# Altium PCB sphbot.PcbDoc
Units mm, origin at the board's own origin, x right, y up, seen from the top; angles counter-clockwise.
Board outline 73 x 68 mm, 4 copper layers (Top Layer, Internal Plane 1, Internal Plane 2, Bottom Layer); 51 components, 41 nets, 253 pads, 47 vias.
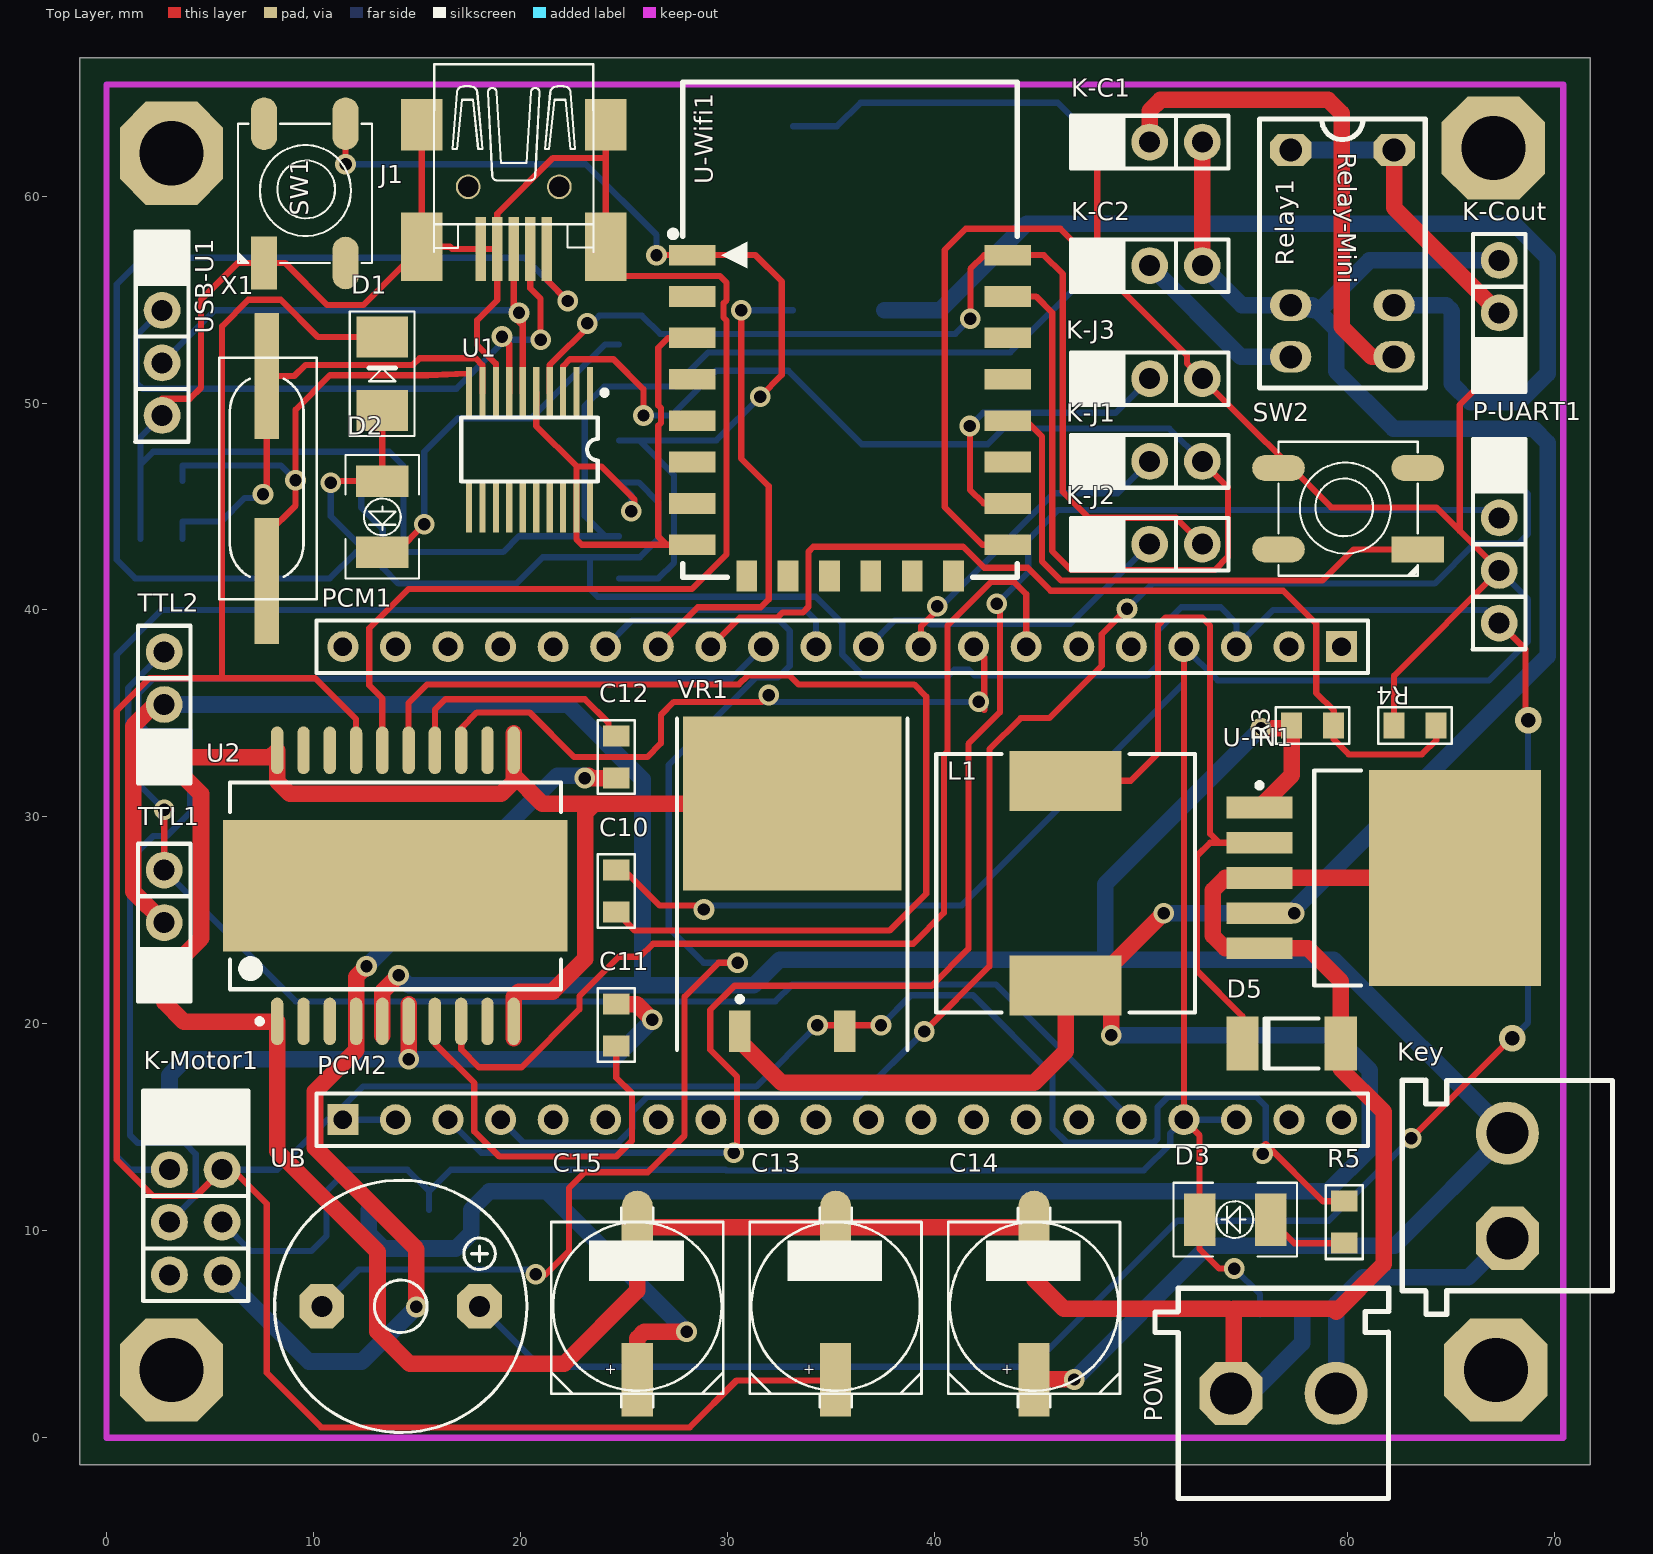
[diagram p0: Top Layer view]
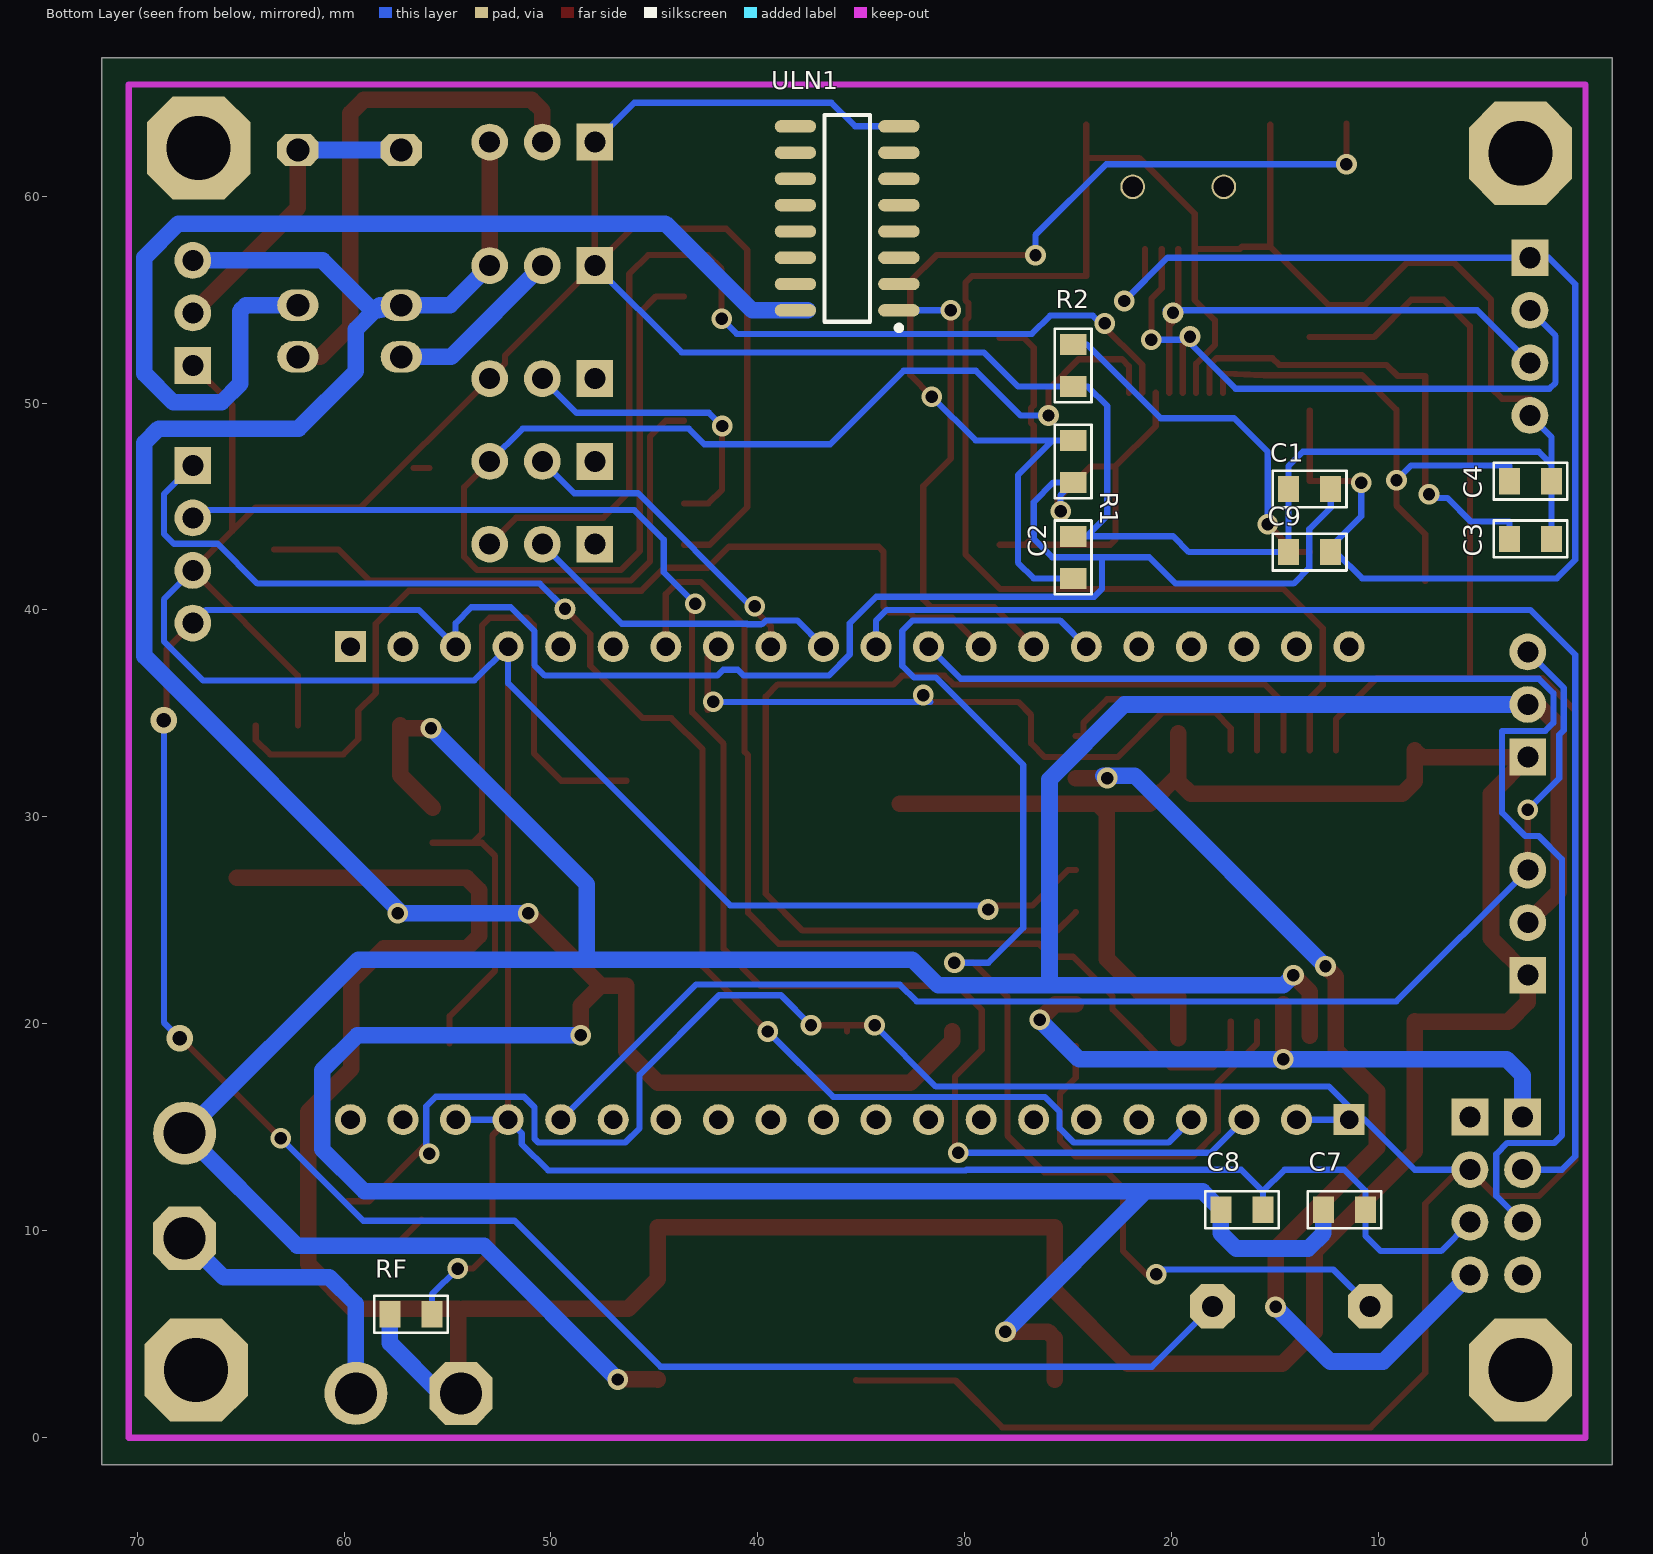
[diagram p1: Bottom Layer view, seen from below]
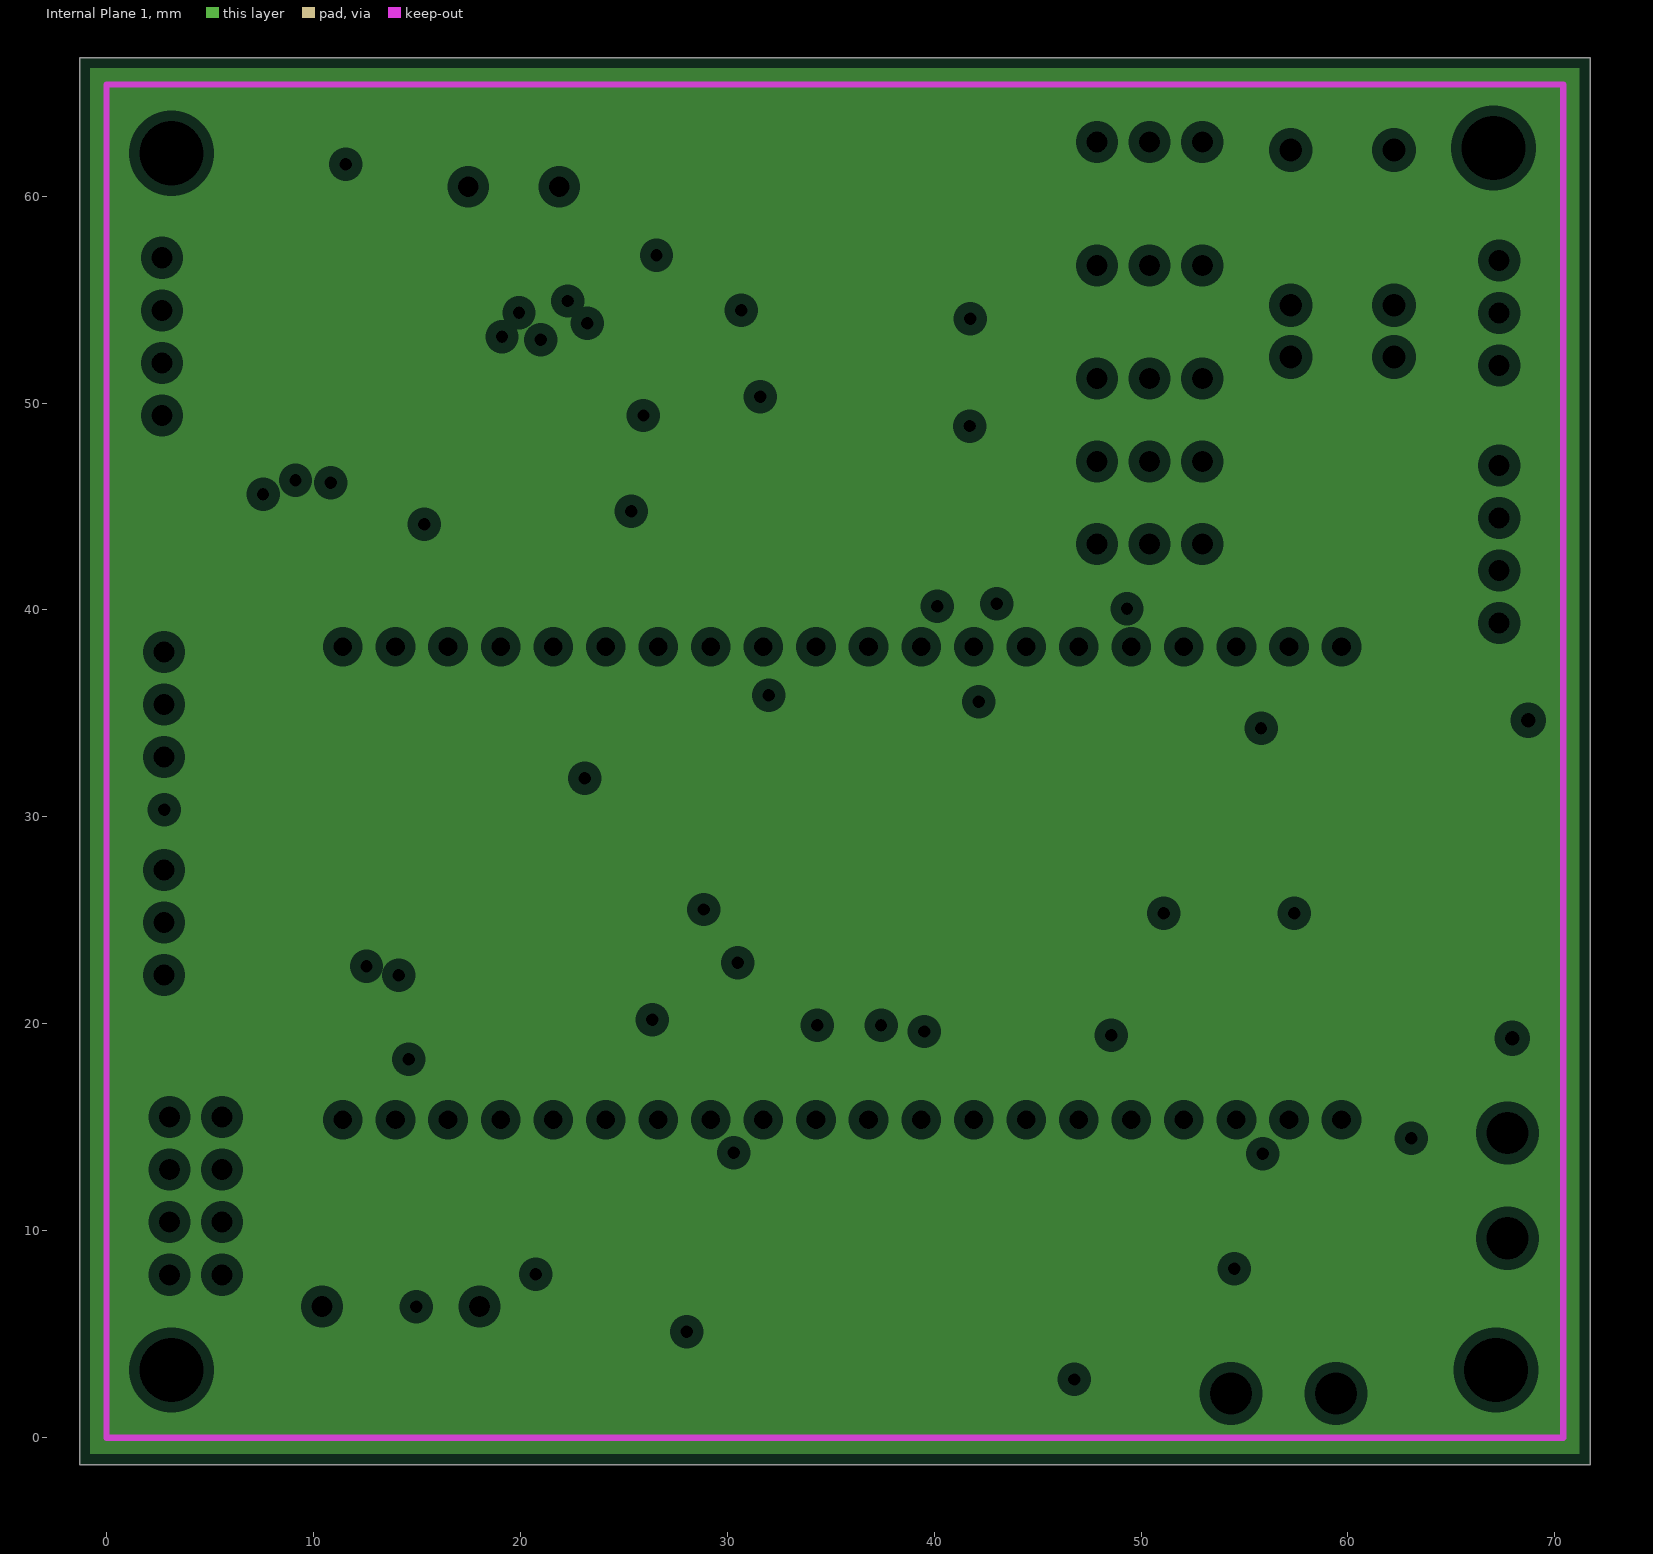
[diagram p2: Internal Plane 1, clearances drawn from the general rule]
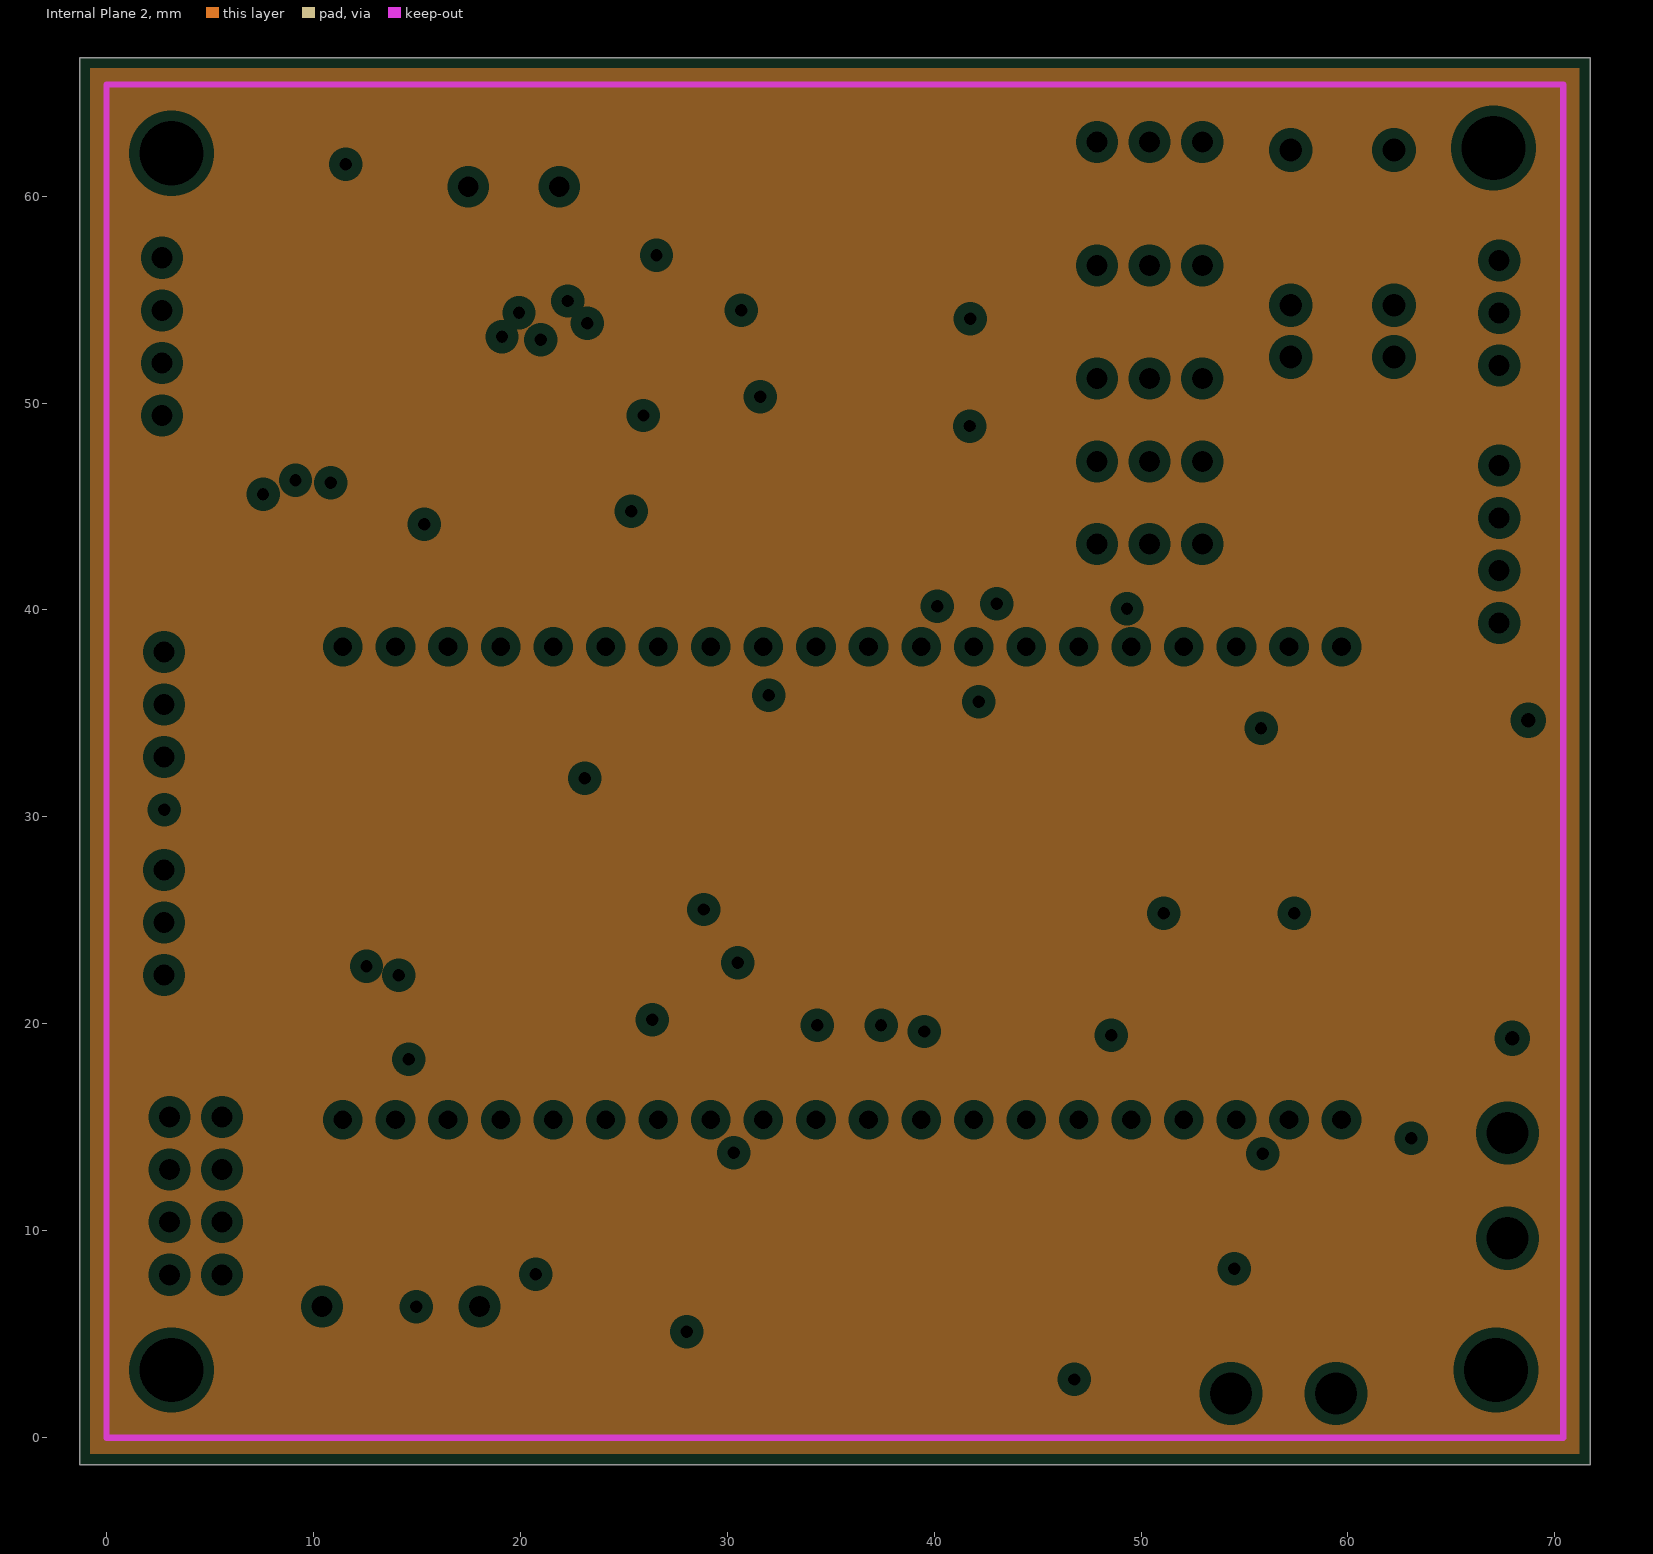
[diagram p3: Internal Plane 2, clearances drawn from the general rule]

## Layer stack, top to bottom
Top Layer: signal copper 0.0356
Dielectric: dielectric 0.32, FR-4, Dk 4.8
Internal Plane 1: plane copper 0.0356
Dielectric: dielectric 0.32, FR-4, Dk 4.8
Internal Plane 2: plane copper 0.0356
Dielectric: dielectric 0.32, FR-4, Dk 4.8
Bottom Layer: signal copper 0.0356

## Board outline
-1.3,-1.3 71.7,-1.3 71.7,66.7 -1.3,66.7

## Design rules (kind name [scope] priority, off if disabled: settings)
Clearance [All] p1: gap=0.2
PlaneClearance [All] p1: clearance=0.508
PlaneConnect [All] p1: planeconnectstyle=Relief reliefexpansion=0.508 reliefentries=4 reliefconductorwidth=0.254 reliefairgap=0.254
PolygonConnect [All] p1: connectstyle=Relief reliefconductorwidth=0.254 reliefentries=4 polygonreliefangle="90 Angle" airgapwidth=0.254
RoutingVias [All] p1: holewidth=0.6 width=1 viastyle="Through Hole" minholewidth=0.711 minwidth=1.27 maxholewidth=0.711 maxwidth=1.27
SolderMaskExpansion [All] p1: expansion=0.102
Width Width_1 [(InNet('+12V') OR InNet('EGND') OR InNet('VIN') OR InNet('C1-IMAGE') OR InNet('C2-IMAGE') OR InNet('IMAGE-OUT') OR InNet('M1-OUT1') OR InNet('M1-OUT2') OR InNet('OUTPUTR1'))] p1: maxlimit=0.8 minlimit=0.8 preferedwidth=0.8
Width [All] p2: maxlimit=1 minlimit=0.3 preferedwidth=0.3
26 further rules are at their usual default settings.

## Components (designator, comment, footprint, x,y, rotation, side; value= is the part's Value field where it differs from the comment)
C1 "1nF" 0805C-TBD 12.573,45.847 r0 bottom
C2 "100nF" 0805C-TBD 24.765,41.783 r90 bottom
C3 "22pF" 0805C-TBD 1.905,43.434 r0 bottom
C4 "22pF" 0805C-TBD 1.905,46.228 r0 bottom
C7 "100nF" 0805C-TBD 12.416,11.019 r180 bottom
C8 "100nF" 0805C-TBD 17.369,11.019 r180 bottom
C9 "100nF" 0805C-TBD 12.573,42.799 r0 bottom
C10 "100nF" 0805C-TBD 24.638,25.654 r90 top
C11 "15nF" 0805C-TBD 24.638,20.701 r270 top
C12 "15nF" 0805C-TBD 24.638,32.131 r90 top
C13 "220uF-25V" PANACAP-F-GENERIC 35.242,6.35 r90 top
C14 "220uF-25V" PANACAP-F-GENERIC 44.831,6.35 r90 top
C15 "220uF-25V" PANACAP-F-GENERIC 25.654,6.35 r90 top
D1 "MBRS140" DIODE-SMA 13.335,48.768 r270 top
D2 "TOPLED-YELLOW" TOPLED-YELLOW 13.335,46.228 r270 top
D3 "TOPLED-RED" TOPLED-RED 56.261,10.541 r180 top
D5 "1N5822" MELF 57.277,19.05 r180 top
J1 "Mini_USB" My_USB 19.685,60.452 r270 top
K-C1 "HEADER-1X3" HEADER-1X3 47.879,62.611 r90 top
K-C2 "HEADER-1X3" HEADER-1X3 47.879,56.642 r90 top
K-Cout "HEADER-1X3" HEADER-1X3 67.31,51.816 r180 top
K-J1 "HEADER-1X3" HEADER-1X3 47.879,47.18 r90 top
K-J2 "HEADER-1X3" HEADER-1X3 47.879,43.18 r90 top
K-J3 "HEADER-1X3" HEADER-1X3 47.879,51.181 r90 top
K-Motor1 "HEADER-2X4" HEADER-2X4 3.048,15.494 r0 top
Key "CON2 pin blue" My_CN2 62.611,7.112 r90 top
L1 "100uh" "WE-PD 1280" 46.355,26.797 r270 top
P-UART1 "HEADER-1X4" HEADER-1X4 67.31,46.99 r0 top
PCM1 "Header 20" HDR1X20 59.69,38.227 r180 top
PCM2 "Header 20" HDR1X20 11.43,15.367 r0 top
POW "CON2 pin blue" My_CN2 51.816,7.239 r0 top
R1 "10K" 0805R-1K 24.765,47.943 r270 bottom
R2 "1K" 0805R-1K 24.765,51.054 r90 bottom
R3 "100K" 0805R-100K 57.531,34.417 r0 top
R4 "10K" 0805R-10K 64.262,34.417 r180 top
R5 "1K" 0805R-1K 59.817,9.652 r90 top
Relay1 "Relay-Mini" Relay_Mini 62.23,62.23 r270 top
RF "1K" 0805R-1K 57.531,5.969 r180 bottom
SW1 "SW-PB6MM-SMD" SW-PB-SMD 7.62,56.769 r90 top
SW2 "SW-PB6MM-SMD" SW-PB-SMD 63.373,42.926 r180 top
TTL1 "HEADER-1X3" HEADER-1X3 2.794,22.352 r180 top
TTL2 "HEADER-1X3" HEADER-1X3 2.794,32.893 r180 top
U1 "CH340T" TSSOP20 20.447,47.752 r180 top
U2 "L6201P" PowerSO20_N 13.97,26.67 r90 top
U-IN1 "LM2576HVS-12.0" TS5B_N 61.722,27.051 r0 top
U-Wifi1 "ESP_12_E" ESP_12_E 27.94,57.15 r0 top
UB "Buzzer small" My_Buzzer 14.224,6.35 r0 top
ULN1 "ULN2003D" SO16_N 35.687,58.928 r0 bottom
USB-U1 "HEADER-1X4" HEADER-1X4 2.692,57.023 r0 top
VR1 "Volt Reg" D2PAK 33.147,25.146 r0 top
X1 "12MHz" XTAL-RU49/4 7.747,51.308 r270 top

## Footprints (in the part's own frame and the unit in brackets; to place one, negate y for a bottom-side part, rotate by r counter-clockwise, add the part's x,y. Pads: shape width x height; smd on the part's side, far side on the other; paste and mask are expansions set on the pad)
0805C-TBD [mil] "CAPACITOR 0805"
  rect 40x50 smd: 1(-10,0) 2(70,0)
  silkscreen extent -40,-35 100,35, body extent -11,-25 70,25, height 26
0805R-1K [mil] "RESISTOR 0805"
  rect 40x50 smd: 1(-10,0) 2(70,0)
  silkscreen extent -40,-35 100,35, body extent -11,-25 70,25, height 27
0805R-10K [mil] "RESISTOR 0805"
  rect 40x50 smd: 1(0,0) 2(80,0)
  silkscreen extent -30,-35 110,35, body extent -1,-25 80,25, height 27
0805R-100K [mil] "RESISTOR 0805"
  rect 40x50 smd: 1(-10,0) 2(70,0)
  silkscreen extent -40,-35 100,35, body extent -11,-25 70,25, height 27
D2PAK [mm] "D2-PAK/TO-263-AB; 3 Leads (1 Cropped); Body 15.5 (inc. leads) x 10.5 mm (LxW max)"
  rect 1.05x2 smd: 1(-2.54,-5.5) 3(2.54,-5.5)
  rect 10.55x8.4 smd: 2(0,5.5)
  silkscreen extent -5.58,-6.4 5.58,9.6
DIODE-SMA [mm]
  rect 2x2.5 smd: A(-0.875,0) K(-4.425,0)
  silkscreen extent -5.65,-1.57 0.35,1.55, body extent -5.2,-1.3 0,1.3, height 2.4
ESP_12_E [mm] "ESP-12 Wi-Fi Module by AI-Thinker"
  rect 2.25x1 smd: 1(0.375,0) 2(0.375,-2) 3(0.375,-4) 4(0.375,-6) 5(0.375,-8) 6(0.375,-10) 7(0.375,-12) 8(0.375,-14) 15(15.625,-14) 16(15.625,-12) 17(15.625,-10) 18(15.625,-8) 19(15.625,-6) 20(15.625,-4) 21(15.625,-2) 22(15.625,0)
  rect 1x1.5 smd: 9(3,-15.5) 10(5,-15.5) 11(7,-15.5) 12(9,-15.5) 13(11,-15.5) 14(13,-15.5)
  silkscreen extent -0.7,-15.57 16.08,8.37, body extent 0,-15.49 16,8.51, height 2.75
HDR1X20 [mm] "Connector; Header; 20 Position"
  rect 1.5x1.5 hole 0.9: 1(0,0)
  round 1.5 hole 0.9: 2(2.54,0) 3(5.08,0) 4(7.62,0) 5(10.16,0) 6(12.7,0) 7(15.24,0) 8(17.78,0) 9(20.32,0) 10(22.86,0) 11(25.4,0) 12(27.94,0) 13(30.48,0) 14(33.02,0) 15(35.56,0) 16(38.1,0) 17(40.64,0) 18(43.18,0) 19(45.72,0) 20(48.26,0)
  silkscreen extent -1.27,-1.27 49.53,1.27
HEADER-1X3 [mil]
  rect 70x70 hole 40: 1(0,0)
  round 70 hole 40: 2(0,-100) 3(0,-200)
  silkscreen extent -50,-250 50,50, body extent -50,-250 50,50, height 470
HEADER-1X4 [mil]
  rect 70x70 hole 40: 1(0,0)
  round 70 hole 40: 2(0,-100) 3(0,-200) 4(0,-300)
  silkscreen extent -51,-350 50,50, body extent -50,-350 50,50, height 470
HEADER-2X4 [mil]
  rect 70x70 hole 40: 1(0,0) 2(100,0)
  round 70 hole 40: 3(0,-100) 4(100,-100) 5(0,-200) 6(100,-200) 7(0,-300) 8(100,-300)
  silkscreen extent -50,-350 150,50, body extent -50,-350 150,50, height 470
MELF [mm] "Metal Electrode Face (MELF) Diode; Body 5 x 2.5 mm (LxDia)"
  rect 1.55x2.6 smd: 1(-2.375,0) 2(2.375,0)
  silkscreen extent -1.3,-1.2 1.3,1.2
My_Buzzer [mil]
  oct 85x85 hole 40: +(150,0) -(-150,0)
  silkscreen extent -240,-240 240,240
My_CN2 [mil]
  oct 120x120 hole 80: 1(99.5,-200.5)
  round 120 hole 80: 2(299.5,-200.5)
  silkscreen extent -45,-401 400,-1
My_USB [mm]
  rect 3.1x0.5 smd: 1(3,1.6) 2(3,0.8) 3(3,0) 4(3,-0.8) 5(3,-1.6)
  rect 2.5x2 smd: 5(-3,4.45) 5(-3,-4.45)
  rect 3.3x2 smd: 5(2.9,4.45) 5(2.9,-4.45)
  round 1.2 hole 1 unplated: ""(0,2.2) ""(0,-2.2)
  silkscreen extent -5.92,-3.85 3.16,3.85
PANACAP-F-GENERIC [mil]
  rect 140x59.06 smd: +(-140,0)
  oval 140x59.06 smd: -(150,0)
  silkscreen extent -192,-163 187,163, body extent -195,-163 195,163, height 402
PowerSO20_N [mm] "SOP, 20-Leads, Body 15.9x11mm, Pitch 1.27mm, IPC Medium Density"
  oval 2.3x0.6 smd: 1(-6.55,5.715) 2(-6.55,4.445) 3(-6.55,3.175) 4(-6.55,1.905) 5(-6.55,0.635) 6(-6.55,-0.635) 7(-6.55,-1.905) 8(-6.55,-3.175) 9(-6.55,-4.445) 10(-6.55,-5.715) 11(6.55,-5.715) 12(6.55,-4.445) 13(6.55,-3.175) 14(6.55,-1.905) 15(6.55,-0.635) 16(6.55,0.635) 17(6.55,1.905) 18(6.55,3.175) 19(6.55,4.445) 20(6.55,5.715)
  rect 6.35x16.65 smd: 21(0,0)
  silkscreen extent -6.67,-8 5,8, body extent -5.55,-8 5.55,8, height 3.6
Relay_Mini [mm]
  oct 1.524x2 hole 1.1: 0(0,0) 1(0,-5)
  oval 1.524x2 hole 1.1: 2(10,-5) 3(10,0) 4(7.5,-5) 5(7.5,0)
  silkscreen extent -1.5,-6.5 11.5,1.5, body extent -1.63,-6.63 11.63,1.63, height 10
SO16_N [mm] "SOIC, 16-Leads, Body 9.9x3.8mm, Pitch 1.27mm, IPC Medium Density"
  oval 2x0.6 smd: 1(-2.5,4.445) 2(-2.5,3.175) 3(-2.5,1.905) 4(-2.5,0.635) 5(-2.5,-0.635) 6(-2.5,-1.905) 7(-2.5,-3.175) 8(-2.5,-4.445) 9(2.5,-4.445) 10(2.5,-3.175) 11(2.5,-1.905) 12(2.5,-0.635) 13(2.5,0.635) 14(2.5,1.905) 15(2.5,3.175) 16(2.5,4.445)
  silkscreen extent -2.62,-5 1.1,5.42, body extent -2,-5 2,5, height 1.75
SW-PB-SMD [mil]
  rect 100x50 smd: 1(0,0)
  oval 100x50 smd: 2(265,-155) 3(0,-155) 4(265,0)
  silkscreen extent 0,-205 265,50, body extent -28,-206 297,50, height 140
TOPLED-RED [mil]
  rect 60x100 smd: A(0,0) K(135,0)
  silkscreen extent -50,-70 185,70, body extent -20,-60 154,60, height 75
TOPLED-YELLOW [mil]
  rect 60x100 smd: A(0,0) K(135,0)
  silkscreen extent -50,-70 185,70, body extent -20,-60 154,60, height 75
TS5B_N [mm] "D2-PAK, 6-Leads, Body 8.6x10.2mm, Pitch 1.7mm, Lead Span 14.1mm, IPC Medium Density"
  rect 3.2x1.05 smd: 1(-6,3.4) 2(-6,1.7) 3(-6,0) 4(-6,-1.7) 5(-6,-3.4)
  rect 8.3x10.45 smd: 6(3.45,0)
  silkscreen extent -6.12,-5.2 -1.1,5.2, body extent -3.35,-5.2 6.05,5.2, height 4.65
TSSOP20 [mm] "Shrink Small Outline; 20 Leads; Body Width 4.4 mm; Pitch 0.65 mm"
  rect 0.3x2.5 smd: 1(-2.925,-2.75) 2(-2.275,-2.75) 3(-1.625,-2.75) 4(-0.975,-2.75) 5(-0.325,-2.75) 6(0.325,-2.75) 7(0.975,-2.75) 8(1.625,-2.75) 9(2.275,-2.75) 10(2.925,-2.75) 11(2.925,2.75) 12(2.275,2.75) 13(1.625,2.75) 14(0.975,2.75) 15(0.325,2.75) 16(-0.325,2.75) 17(-0.975,2.75) 18(-1.625,2.75) 19(-2.275,2.75) 20(-2.925,2.75)
  silkscreen extent -3.75,-2.87 3.3,1.55
"WE-PD 1280" [mm] "SMD Inductor, 2-Leads, Body 12,0x12,0mm"
  rect 2.9x5.4 smd: 1(-4.95,0) 2(4.95,0)
  silkscreen extent -6.25,-6.25 6.25,6.25, body extent -6,-6 6,6, height 7.99
XTAL-RU49/4 [mil]
  rect 240x47.24 smd: 1(0,0) 2(390,0)
  silkscreen extent -35,-90 425,95, body extent -78,-90 468,95, height 120

## Part data
C1: library part 0805C-18PF-50V-C0G-JOH, "CAPACITOR 0805 CERAMIC"
C2 C7 C8 C9 C10 C11 C12: library part 0805C-100nF-25V-X7R-MUR, "CAPACITOR 0805 CERAMIC"
C3 C4: library part "Cap Semi", "Capacitor (Semiconductor SIM Model)"
C13 C14 C15: library part PANACAP-220UF-25V-FK, "GENERIC CAPACITOR POLARISED"
D1: "DIODE"
D3: library part TOPLED-BLUE, "TOPLED-BLUE"
D5: library part ZMU100, "High-Voltage Power Zener Diode"
J1: "USB 2.0, Right Angle, SMT, B Type, Receptacle, 5 Position, Black"
Key POW: "Connector blue screw"
L1: library part "WE-PD 1280, XL, 744770122", "SMD-Shielded Power Inductor WE-PD, L=22.0 µH"
PCM1 PCM2: "Header, 20-Pin"
R1 R5 RF: library part ERJ6RS, "Low Ohmic Value Thick Film Chip Resistor, 0.1 Ohm to 0.2 Ohm Range, 1%, 2% and 5% Tolerance, 0805 Size, 0.125 W"
R2: library part "Res Semi", "Semiconductor Resistor"
R3: library part 0805R-100K, "RESISTOR 0805 1/4 WATT THIN FILM"
R4: library part 0805R-10K, "RESISTOR 0805 1/4 WATT THIN FILM"
SW1 SW2: "PUSHBUTTON SWITCH 6MM SMD"
U2: "DMOS Full Bridge Driver"
U-IN1: library part LM2576HVS-5.0, "SIMPLE SWITCHER; 3A Step-Down Voltage Regulator"
U-Wifi1: "ESP-12 Wi-Fi Module by AI-Thinker"
UB: library part Buzzer, "5-12v small buzzer (12mm)"
ULN1: library part ULN2002D, "Seven Darlington Array"
VR1: "Voltage Regulator"
X1: library part CRYSTAL-GENERIC, "GENERIC CRYSTAL"

## Free pads (board coordinates)
  oct 5x5 hole 3.1: 0(3.145,62.073) 1(67.026,62.327) 2(67.153,3.272) 3(3.145,3.272)

## Via types
v1: diameter 1, hole 0.6, Top Layer to Bottom Layer, 45 vias
v2: diameter 1.27, hole 0.711, Top Layer to Bottom Layer, 2 vias

## Nets (pads, with @x,y where several pads share a name; then routed paths per layer and width w, separated by ;. In a path a pad name is that pad's centre, name@x,y a point inside that pad or via, vN(x,y) a via of type N, cw(c..) or ccw(c..) an arc to the next point about the centre after c; other vN are vias at no path point)
+3.3V: C1.1 P-UART1.4 PCM1.3 R1.2 U1.5 U1.19 U-Wifi1.3 U-Wifi1.8 UB.+ | length 185.3
  Top Layer w0.3: U1.5 20.772,48.891 22.722,46.941 ; v1(25.37,44.776) 25.527,44.933 25.527,45.339 23.925,46.941 22.722,46.941 ; U-Wifi1.8 27.072,43.15 ; U-Wifi1.3 27.148,53.15 26.67,52.672 26.67,49.885 26.804,49.75 26.804,49.046 26.67,48.912 26.67,43.552 27.072,43.15 ; v1(63.064,14.473) v2@67.92,19.329 ; P-UART1.4 68.58,38.1 v2@68.58,34.925 ; 22.722,46.941 U1.19 22.722,43.404 22.976,43.15 27.072,43.15
  Bottom Layer w0.3: C1.1 12.319,44.949 13.356,43.912 13.356,42.032 14.113,41.275 19.812,41.275 21.082,42.545 25.781,42.545 26.67,43.434 26.67,45.212 25.717,46.165 R1.2 25.37,45.56 v1(25.37,44.776) ; UB.+ 20.955,3.429 44.704,3.429 51.761,10.486 59.076,10.486 v1(63.064,14.473) ; 23.368,42.545 23.368,41.021 23.749,40.64 34.281,40.64 35.56,39.361 35.56,37.849 36.579,36.83 40.683,36.83 40.969,37.117 41.673,37.117 41.96,36.83 50.292,36.83 50.8,37.338 50.8,38.989 51.943,40.132 53.848,40.132 54.61,39.37 PCM1.3 56.388,40.005 66.675,40.005 P-UART1.4 ; v2(67.945,19.304) 68.707,20.066 v2(68.707,34.671)
+5V: C13.+ D1.K K-Motor1.4 PCM2.1 PCM2.2 R5.2 U2.17 VR1.3 | length 188.9
  Top Layer w0.3: U2.17 12.065,34.717 10.084,36.698 ; D1.K 10.222,53.193 8.424,54.991 6.858,54.991 5.588,53.721 5.588,36.698 10.084,36.698 ; v1(34.362,19.934) VR1.3@35.687,19.934 ; C13.+ 35.243,2.764 30.45,2.764 28.186,0.5 10.387,0.5 7.747,3.14 7.747,11.303 5.855,13.195 4.339,11.679 ; VR1.3 VR1.3@35.687,19.934 ; v1(37.435,19.934) VR1.3@35.687,19.934 ; v1(55.88,13.716) 55.88,14.046 56.028,14.194 58.792,11.43 R5.2 ; 4.339,11.679 K-Motor1.4 4.339,11.705 4.339,11.679 ; 4.339,11.679 2.256,11.679 0.5,13.435 0.5,35.12 2.078,36.698 10.084,36.698
  Bottom Layer w0.3: K-Motor1.4 8.255,12.954 10.668,15.367 PCM2.1 ; PCM2.2 PCM2.1 ; v1(34.362,19.934) 31.394,16.967 12.395,16.967 11.43,16.002 PCM2.1 ; v1(37.435,19.934) 38.883,21.382 41.88,21.382 45.715,17.547 45.715,14.956 46.404,14.267 50.618,14.267 50.795,14.445 50.795,15.972 51.303,16.48 55.571,16.48 56.028,16.023 56.028,13.864 v1(55.88,13.716)
+12V: C7.1 C8.1 C15.+ K-C1.3 K-C2.3 K-Cout.3 L1.2 Relay1.4 U-IN1.4 VR1.1 | length 186
  Top Layer w0.8: C15.+ 25.654,4.796 25.984,5.126 v1(28.037,5.126) ; VR1.1 30.607,19.177 32.639,17.145 44.831,17.145 46.355,18.669 L1.2 L1.2@47.595,21.847 ; v1(48.56,19.452) 48.56,20.882 L1.2@47.595,21.847 ; v1(51.093,25.345) L1.2@47.595,21.847 ; K-C2.3 K-C1.3
  Bottom Layer w0.8: C7.1 12.67,9.876 13.402,9.144 16.891,9.144 17.623,9.876 C8.1 18.512,11.908 59.025,11.908 61.057,13.94 61.057,17.75 59.355,19.452 v1(48.56,19.452) ; 21.255,11.908 v1(28.037,5.126) ; v1(51.093,25.345) 57.222,25.345 69.65,37.773 69.65,48.079 68.961,48.768 62.195,48.768 59.431,51.532 59.431,53.564 58.569,54.426 ; K-C2.3 54.871,54.73 Relay1.4 ; K-Cout.3 61.039,56.896 58.569,54.426 ; Relay1.4 58.265,54.73 58.569,54.426 ; Relay1.4 58.569,54.426
  other v1: 57.404,25.351
+U2-VUSB: C9.1 D1.A D2.A J1.1 USB-U1.1 | length 62.1
  Top Layer w0.3: v1(10.841,46.147) 10.922,46.228 D2.A 13.335,47.925 D1.A ; J1.1 21.285,55.949 v1(22.301,54.933)
  Bottom Layer w0.3: v1(10.841,46.147) 10.841,44.531 12.319,43.053 C9.1 12.065,42.799 10.795,41.529 1.397,41.529 0.5,42.426 0.5,55.745 1.778,57.023 USB-U1.1 20.212,57.023 v1(22.301,54.933)
ADC0: PCM1.13 R3.2 R4.1 | length 46.5
  Top Layer w0.3: PCM1.13 30.607,39.624 32.417,39.624 32.671,39.878 33.655,39.878 33.93,40.153 33.93,42.82 34.163,43.053 41.402,43.053 42.418,42.037 44.524,42.037 45.63,40.931 56.875,40.931 58.466,39.34 58.466,35.987 59.309,35.144 R3.2 59.309,33.752 60.041,33.02 63.576,33.02 64.262,33.706 R4.1
BUZZER: PCM1.15 UB.- | length 63.9
  Top Layer w0.3: v1(20.753,7.895) 21.23,7.895 22.352,9.017 22.352,12.065 23.114,12.827 26.162,12.827 27.94,14.605 27.94,21.311 29.586,22.957 v1(30.501,22.957)
  Bottom Layer w0.3: UB.- 12.192,8.128 20.52,8.128 v1(20.753,7.895) ; PCM1.15 25.4,39.497 32.512,39.497 33.02,38.989 33.02,37.3 32.46,36.74 31.405,36.74 27.178,32.513 27.178,24.638 28.859,22.957 v1(30.501,22.957)
C1-IMAGE: K-C1.2 Relay1.3 | length 24.7
  Top Layer w0.8: K-C1.2 50.419,64.135 50.934,64.65 59.048,64.65 59.69,64.008 59.69,53.686 61.146,52.23 Relay1.3
C2-IMAGE: K-C2.2 Relay1.2 | length 8.6
  Bottom Layer w0.8: K-C2.2 54.831,52.23 Relay1.2
CHANNELA: K-Motor1.5 PCM1.12 | length 63.7
  Bottom Layer w0.3: K-Motor1.5 4.318,11.684 4.318,13.707 3.78,14.245 1.503,14.245 1.143,14.605 1.143,27.965 2.256,29.078 2.916,29.078 4.034,30.196 4.034,34.158 1.951,34.158 1.555,34.555 1.555,35.972 2.256,36.673 30.196,36.673 PCM1.12
CHANNELB: K-Motor1.3 PCM1.11 | length 63.2
  Bottom Layer w0.3: K-Motor1.3 1.143,12.954 0.5,13.597 0.5,37.838 2.667,40.005 33.782,40.005 34.29,39.497 PCM1.11
EGND: C13.- C14.- C15.- D5.1 POW.1 RF.1 TTL1.1 TTL2.1 U2.1 U2.10 U2.11 U2.20 U-IN1.3 U-IN1.5 U-IN1.6 VR1.2 | length 188.7
  Top Layer w0.8: U2.1 U2.1@8.255,20.112 ; U2.10@19.685,19.304 19.685,21.306 19.939,21.56 21.56,21.56 23.135,23.135 23.135,30.196 23.585,30.646 ; U2.11@19.685,34.036 19.685,32.013 ; VR1.2 23.585,30.646 ; POW.1@54.229,2.261 54.483,2.515 54.483,6.223 59.423,6.223 ; 54.229,6.223 46.27,6.223 44.831,7.662 C14.- C13.- C15.- 25.654,7.107 22.123,3.577 14.651,3.577 13.102,5.126 13.102,8.995 8.255,13.842 U2.1@8.255,20.112 ; 59.423,6.083 61.722,8.382 61.722,15.756 59.652,17.826 D5.1 59.652,22.068 58.069,23.651 U-IN1.5 54.072,23.651 53.467,24.256 53.467,26.446 54.072,27.051 U-IN1.3 U-IN1.6 ; U2.1@8.255,20.112 3.734,20.112 2.794,21.052 TTL1.1 4.572,24.13 4.572,31.115 TTL2.1 7.928,32.893 U2.20 8.255,31.715 8.86,31.11 19.075,31.11 19.685,31.72 19.685,32.013 ; 19.685,32.013 21.052,30.646 23.585,30.646
  Bottom Layer w0.8: POW.1 55.359,2.146 57.785,4.572 RF.1
GND: C1.2 C2.2 C3.1 C4.1 C7.2 C8.2 C9.2 C10.2 D3.K J1.4 J1.5 K-C1.1 K-C2.1 K-Cout.1 K-J3.3 K-Motor1.6 P-UART1.3 PCM1.4 PCM2.17 PCM2.18 R2.1 R4.2 RF.2 SW1.1 SW2.2 U1.8 U2.16 U-Wifi1.15 ULN1.8 USB-U1.4 | length 404.8
  Top Layer w0.3: USB-U1.4 2.692,50.211 4.034,50.211 4.572,50.749 4.572,54.991 6.35,56.769 SW1.1 8.636,56.769 10.668,54.737 12.42,54.737 J1.5@15.235,57.552 ; U2.16 13.335,35.729 12.7,36.364 12.7,39.116 14.605,41.021 28.306,41.021 29.972,42.687 29.972,53.987 29.829,54.131 29.829,54.835 29.972,54.978 29.972,55.82 29.658,56.134 24.135,56.134 24.135,57.552 J1.5@24.135,63.452 ; J1.5@15.235,63.452 J1.5@15.235,57.552 ; U1.8 18.822,51.896 17.916,52.802 17.916,54.008 18.885,54.977 J1.4 ; 24.135,61.849 21.582,61.849 18.885,59.152 J1.4 ; C10.2 25.019,27.432 26.725,25.726 28.596,25.726 28.794,25.527 v1(28.875,25.527) ; U-Wifi1.15 42.337,43.15 40.513,44.974 40.513,57.404 41.529,58.42 46.101,58.42 K-C2.1 ; K-C1.1 K-C2.1 ; PCM1.4 PCM2.17 52.832,14.605 D3.K 52.832,9.114 53.772,8.174 v1(54.504,8.174) ; SW2.2@55.88,46.863 SW2.2 ; R4.2 62.23,36.83 P-UART1.3 64.262,44.958 59.182,44.958 K-J3.3 52.218,51.922 52.218,52.303 K-C2.1 ; 65.405,43.815 65.405,49.911 K-Cout.1 ; J1.5@15.235,57.552 16.607,57.552 16.707,57.452 18.085,57.452 J1.4
  Bottom Layer w0.3: C3.1 C4.1 1.651,47.041 ; USB-U1.4 1.651,48.362 1.651,47.041 ; K-Motor1.6 6.985,9.017 9.906,9.017 10.638,9.749 C7.2 10.638,11.933 11.659,12.954 14.545,12.954 15.591,11.908 ; C8.2 15.591,11.908 ; C2.2 24.1,43.561 ; v1(28.875,25.527) 28.794,25.527 28.596,25.726 41.347,25.726 52.07,36.449 PCM1.4 53.7,36.597 66.822,36.597 68.707,38.482 68.707,40.513 P-UART1.3 ; ULN1.8 35.301,63.373 36.444,64.516 45.974,64.516 K-C1.1 ; K-C2.1 43.688,52.451 29.078,52.451 27.427,50.8 R2.1 24.054,50.8 23.114,49.86 23.114,44.547 24.1,43.561 ; v1(54.504,8.174) 55.753,6.925 RF.2 ; PCM2.18 PCM2.17 51.408,14.705 51.408,14.192 50.132,12.917 29.958,12.917 29.921,12.954 16.637,12.954 15.591,11.908 ; 1.651,47.041 2.256,47.646 13.665,47.646 14.351,46.96 C1.2 C9.2 19.172,42.799 19.934,43.561 24.1,43.561
IMAGE-OUT: K-Cout.2 Relay1.0 Relay1.1 | length 15
  Top Layer w0.8: Relay1.0 62.23,59.436 K-Cout.2
  Bottom Layer w0.8: Relay1.1 Relay1.0
M1-OUT1: C11.1 K-Motor1.1 U2.6 | length 31.2
  Top Layer w0.8: v1(14.605,18.283) U2.6@14.605,20.955 ; C11.1 25.624,20.955 v1(26.386,20.193)
  Bottom Layer w0.8: K-Motor1.1 3.048,17.526 3.805,18.283 24.476,18.283 v1(26.386,20.193)
M1-OUT2: C12.1 K-Motor1.8 U2.4 | length 48.2
  Top Layer w0.8: v1(12.568,22.779) 12.065,22.276 U2.4 12.065,18.719 10.08,16.734 10.08,14.017 14.981,9.116 v1(14.981,6.32) ; v1(23.114,31.877) 23.19,31.877 23.313,31.999 23.435,31.877 C12.1
  Bottom Layer w0.8: K-Motor1.8 9.779,3.683 12.344,3.683 v1(14.981,6.32) ; v1(12.568,22.779) 21.789,31.999 23.313,31.999 23.19,31.877 v1(23.114,31.877)
NetC2_1: C2.1 R1.1 SW1.2 U-Wifi1.1 | length 49.2
  Top Layer w0.3: v1(11.557,61.54) SW1.2 ; v1(26.585,57.15) U-Wifi1.1 31.369,57.15 32.639,55.88 32.639,51.359 v1(31.593,50.313)
  Bottom Layer w0.3: v1(11.557,61.54) 23.169,61.54 26.585,58.124 v1(26.585,57.15) ; C2.1 26.67,41.529 27.432,42.291 27.432,46.516 25.751,48.197 ; R1.1 25.751,48.197 ; v1(31.593,50.313) 29.477,48.197 25.751,48.197
NetC10_1: C10.1 U2.15 | length 53.9
  Top Layer w0.3: U2.15 14.605,35.509 15.501,36.405 30.563,36.405 30.988,36.83 33.02,36.83 33.445,36.405 39.033,36.405 39.624,35.814 39.624,26.289 37.846,24.511 25.527,24.511 C10.1
NetC11_2: C11.2 U2.7 | length 19.4
  Top Layer w0.3: U2.7 15.875,19.05 17.78,17.145 17.78,14.799 18.99,13.589 24.638,13.589 25.4,14.351 25.4,16.637 24.638,17.399 C11.2
NetC12_2: C12.2 U2.14 | length 12
  Top Layer w0.3: U2.14 15.875,35.179 16.383,35.687 23.125,35.687 24.265,34.547 24.265,33.909 C12.2
NetD2_K: D2.K R2.2 | length 17.6
  Top Layer w0.3: D2.K 14.021,42.799 v1(15.362,44.141)
  Bottom Layer w0.3: v1(15.362,44.141) 15.362,47.646 16.988,49.271 20.539,49.271 24.1,52.832 R2.2
NetD3_A: D3.A R5.1 | length 4
  Top Layer w0.3: D3.A 57.404,9.398 R5.1
NetD5_2: D5.2 L1.1 U-IN1.2 | length 38
  Top Layer w0.3: L1.1 49.5,31.747 50.821,33.068 50.821,39.264 51.181,39.624 52.959,39.624 53.335,39.248 53.335,29.183 53.767,28.751 ; D5.2 54.902,20.374 52.705,22.571 52.705,28.118 53.338,28.751 53.767,28.751 ; U-IN1.2 53.767,28.751
NetK-J3_2: K-J3.2 U-Wifi1.16 | length 14.8
  Top Layer w0.3: v1(41.728,48.89) 41.728,45.81 42.388,45.15 U-Wifi1.16
  Bottom Layer w0.3: v1(41.728,48.89) 42.367,49.53 48.768,49.53 K-J3.2
NetKey_1: Key.1 POW.2 | length 13.5
  Bottom Layer w0.8: POW.2@60.071,2.794 59.436,3.429 59.436,6.477 60.706,7.747 65.811,7.747 Key.1
NetSW2_1: SW2.1 U-Wifi1.18 | length 27.2
  Top Layer w0.3: U-Wifi1.18 44.449,49.15 45.212,48.387 45.212,42.349 46.13,41.431 58.774,41.431 60.27,42.926 SW2.1
OUTPUTR1: Relay1.5 ULN1.16 | length 52.1
  Bottom Layer w0.8: ULN1.16@37.592,54.483 40.28,54.483 44.471,58.674 68.012,58.674 69.65,57.036 69.65,51.427 68.261,50.038 65.913,50.038 65.024,50.927 65.024,54.446 64.74,54.73 Relay1.5
PCM0: PCM1.14 ULN1.1 | length 23.3
  Top Layer w0.3: PCM1.14 28.575,40.132 31.623,40.132 32.004,40.513 32.004,45.99 30.679,47.316 v1(30.679,54.483)
  Bottom Layer w0.3: v1(30.679,54.483) ULN1.1
PWM0: PCM1.7 U2.8 | length 49.9
  Top Layer w0.3: U2.8 17.145,18.766 18.004,17.907 20.066,17.907 22.86,20.701 22.86,21.336 24.765,23.241 25.781,23.241 26.416,23.876 38.989,23.876 40.471,25.358 40.471,32.978 40.64,33.147 40.64,39.243 42.744,41.347 43.87,41.347 44.45,40.767 PCM1.7
PWM1: PCM1.8 U2.13 | length 34.1
  Top Layer w0.3: U2.13 17.145,34.29 17.907,35.052 20.447,35.052 22.606,32.893 26.137,32.893 26.797,33.553 26.797,34.925 27.427,35.555 31.669,35.555 v1(32.004,35.89) ; PCM1.8 42.418,37.719 42.418,35.17 42.028,35.56 v1(42.164,35.56)
  Bottom Layer w0.3: v1(32.004,35.89) 31.669,35.555 42.023,35.555 42.028,35.56 v1(42.164,35.56)
RX2: K-J2.2 PCM1.10 | length 15.8
  Bottom Layer w0.3: PCM1.10 38.1,39.497 39.604,39.497 39.774,39.327 39.826,39.327 39.845,39.307 40.498,39.307 40.531,39.34 46.579,39.34 K-J2.2
RX3: P-UART1.1 PCM2.4 | length 73.7
  Top Layer w0.3: v1(39.518,19.63) 42.672,22.784 42.672,33.274 44.177,34.779 45.574,34.779 48.103,37.308 48.103,38.832 v1(49.322,40.051)
  Bottom Layer w0.3: PCM2.4 20.15,14.267 24.732,14.267 25.421,14.956 25.421,15.756 26.132,16.467 36.355,16.467 v1(39.518,19.63) ; v1(49.322,40.051) 50.546,41.275 64.186,41.275 66.112,43.201 68.22,43.201 68.707,43.688 68.707,45.593 P-UART1.1
TTL: PCM2.16 TTL1.3 TTL2.3 | length 64.4
  Top Layer w0.3: TTL1.3 v1(2.794,30.344)
  Bottom Layer w0.3: TTL1.3 9.144,21.082 32.326,21.082 33.144,21.901 42.997,21.901 PCM2.16 ; v1(2.794,30.344) 1.27,31.868 1.27,33.969 1.055,34.184 1.055,36.234 TTL2.3
TX2: K-J1.2 PCM1.9 | length 15.7
  Top Layer w0.3: PCM1.9 39.37,39.218 40.31,40.157 40.165,40.157 v1(40.146,40.177)
  Bottom Layer w0.3: v1(40.146,40.177) 40.165,40.157 40.31,40.157 45.792,45.639 48.878,45.639 K-J1.2
TX3: P-UART1.2 PCM2.3 | length 80.3
  Top Layer w0.3: v1(30.31,13.767) 30.48,13.937 30.48,17.45 29.18,18.75 29.18,20.671 30.353,21.844 39.878,21.844 41.656,23.622 41.656,33.528 43.18,35.052 43.18,40.148 v1(43.023,40.305)
  Bottom Layer w0.3: PCM2.3 18.11,13.767 v1(30.31,13.767) ; v1(43.023,40.305) 44.547,41.829 44.547,43.404 45.974,44.831 66.929,44.831 P-UART1.2
U2-USB2D+: J1.3 U1.6 USB-U1.3 | length 29.6
  Top Layer w0.3: J1.3 19.685,54.179 20.124,53.74 20.124,52.208 20.122,52.206 U1.6@20.122,51.383 ; v1(19.939,54.356) 19.939,54.121 20.134,53.925 20.134,51.383 U1.6@20.122,51.383 ; U1.6 U1.6@20.122,51.383
  Bottom Layer w0.3: USB-U1.3 5.232,54.483 20.301,54.483 19.939,54.121 v1(19.939,54.356)
U2-USB2D-: J1.2 U1.7 USB-U1.2 | length 32.1
  Top Layer w0.3: v1(19.117,53.213) 19.472,52.858 U1.7 ; J1.2 20.485,55.545 20.984,55.046 v1(20.984,53.056)
  Bottom Layer w0.3: USB-U1.2 1.453,53.244 1.453,50.988 1.748,50.694 16.912,50.694 19.274,53.056 v1(20.984,53.056)
U2-X1: C3.2 U1.9 X1.1 | length 24
  Top Layer w0.3: v1(7.569,45.593) 7.747,45.415 X1.1 9.089,51.308 9.624,51.843 14.81,51.843 15.134,52.167 17.844,52.167 18.172,51.839 U1.9
  Bottom Layer w0.3: C3.2 3.683,44.272 5.537,44.272 6.68,45.415 7.747,45.415 v1(7.569,45.593)
U2-X2: C4.2 U1.10 X1.2 | length 25.4
  Top Layer w0.3: X1.2 7.747,43.658 9.139,45.05 v1(9.139,46.274) 9.139,49.678 10.805,51.343 15.548,51.343 17.481,51.429 17.522,51.43 U1.10
  Bottom Layer w0.3: C4.2 3.683,46.99 8.424,46.99 v1(9.139,46.274)
VIN: C14.+ Key.2 R3.1 TTL1.2 TTL2.2 U2.5 U-IN1.1 | length 166.9
  Top Layer w0.8: TTL1.2 1.291,26.395 1.291,34.387 2.337,35.433 TTL2.2 ; U2.5@13.335,19.431 13.335,21.56 v1(14.12,22.345) ; C14.+ 44.831,2.815 v1(46.776,2.815) ; U-IN1.1 57.277,32.006 R3.1@57.277,34.285 ; v1(55.799,34.285) R3.1@57.277,34.285 ; R3.1 R3.1@57.277,34.285
  Bottom Layer w0.8: TTL2.2 22.292,35.433 25.908,31.817 25.908,21.857 ; v1(14.12,22.345) 14.608,21.857 31.286,21.857 32.531,23.101 59.322,23.101 ; v1(46.776,2.815) 53.235,9.274 62.259,9.274 Key.2 59.322,23.101 ; v1(55.799,34.285) 48.26,26.746 48.26,23.101 59.322,23.101
WIFI-RXD: K-J1.3 U1.3 U-Wifi1.21 | length 65.8
  Top Layer w0.3: U1.3 22.072,51.786 22.402,52.116 24.506,52.116 25.954,50.668 v1(25.954,49.398) ; U-Wifi1.21 44.928,55.15 45.712,54.366 45.712,42.849 46.63,41.931 53.564,41.931 54.199,42.566 54.199,45.941 K-J1.3
  Bottom Layer w0.3: v1(25.954,49.398) 27.3,49.398 29.464,51.562 32.96,51.562 36.507,48.015 42.59,48.015 43.343,48.768 51.372,48.768 K-J1.3
WIFI-TXD: K-J2.3 U1.4 U-Wifi1.22 | length 49.5
  Top Layer w0.3: U1.4 21.422,51.843 23.397,53.818 23.367,53.848 v1(23.241,53.848) ; v1(41.753,54.072) 41.753,56.485 42.418,57.15 U-Wifi1.22 45.304,57.15 46.212,56.242 46.212,45.711 47.468,44.455 51.684,44.455 K-J2.3
  Bottom Layer w0.3: v1(23.241,53.848) 23.367,53.848 23.397,53.818 23.808,54.229 25.873,54.229 26.762,53.34 41.021,53.34 v1(41.753,54.072)
pads on no net: J1. K-J1.1 K-J2.1 K-J3.1 K-Motor1.2 K-Motor1.7 PCM1.1 PCM1.2 PCM1.5 PCM1.6 PCM1.16 PCM1.17 PCM1.18 PCM1.19 PCM1.20 PCM2.5 PCM2.6 PCM2.7 PCM2.8 PCM2.9 PCM2.10 PCM2.11 PCM2.12 PCM2.13 PCM2.14 PCM2.15 PCM2.19 PCM2.20 SW1.3 SW1.4 SW2.3 SW2.4 U1.1 U1.2 U1.11 U1.12 U1.13 U1.14 U1.15 U1.16 U1.17 U1.18 U1.20 U2.2 U2.3 U2.9 U2.12 U2.18 U2.19 U2.21 U-Wifi1.2 U-Wifi1.4 U-Wifi1.5 U-Wifi1.6 U-Wifi1.7 U-Wifi1.9 U-Wifi1.10 U-Wifi1.11 U-Wifi1.12 U-Wifi1.13 U-Wifi1.14 U-Wifi1.17 U-Wifi1.19 U-Wifi1.20 ULN1.2 ULN1.3 ULN1.4 ULN1.5 ULN1.6 ULN1.7 ULN1.9 ULN1.10 ULN1.11 ULN1.12 ULN1.13 ULN1.14 ULN1.15

## Polygon pours and split planes (outlines as drawn)
no net on Internal Plane 1 (split plane): 71.19,-0.79 -0.79,-0.79 -0.79,66.19 71.19,66.19
no net on Internal Plane 2 (split plane): 71.19,-0.79 -0.79,-0.79 -0.79,66.19 71.19,66.19

## Keep-outs
Keep-Out Layer:
  lines w0.3: 0,0 70.4,0 70.4,65.4 0,65.4 0,0

## Dimensions
0,0 to 70.4,0 on Mechanical 1
0,0 to 0,65.4 on Mechanical 1

## Text inside footprints (layer, text, board x,y; h text height)
C13: Top Overlay "+" at 34.342,2.998 h0.89 r90
C14: Top Overlay "+" at 43.931,2.998 h0.89 r90
C15: Top Overlay "+" at 24.754,2.998 h0.89 r90
U-Wifi1: Mechanical 13 "ANTENNA AREA" at 28.067,64.897 h0.25; Mechanical 13 "CUTOUT POLYGON" at 28.067,64.389 h0.25